# EAGLE board BX31 IoT Board MULTI (EAGLE 7.7.0), part 1 of 2
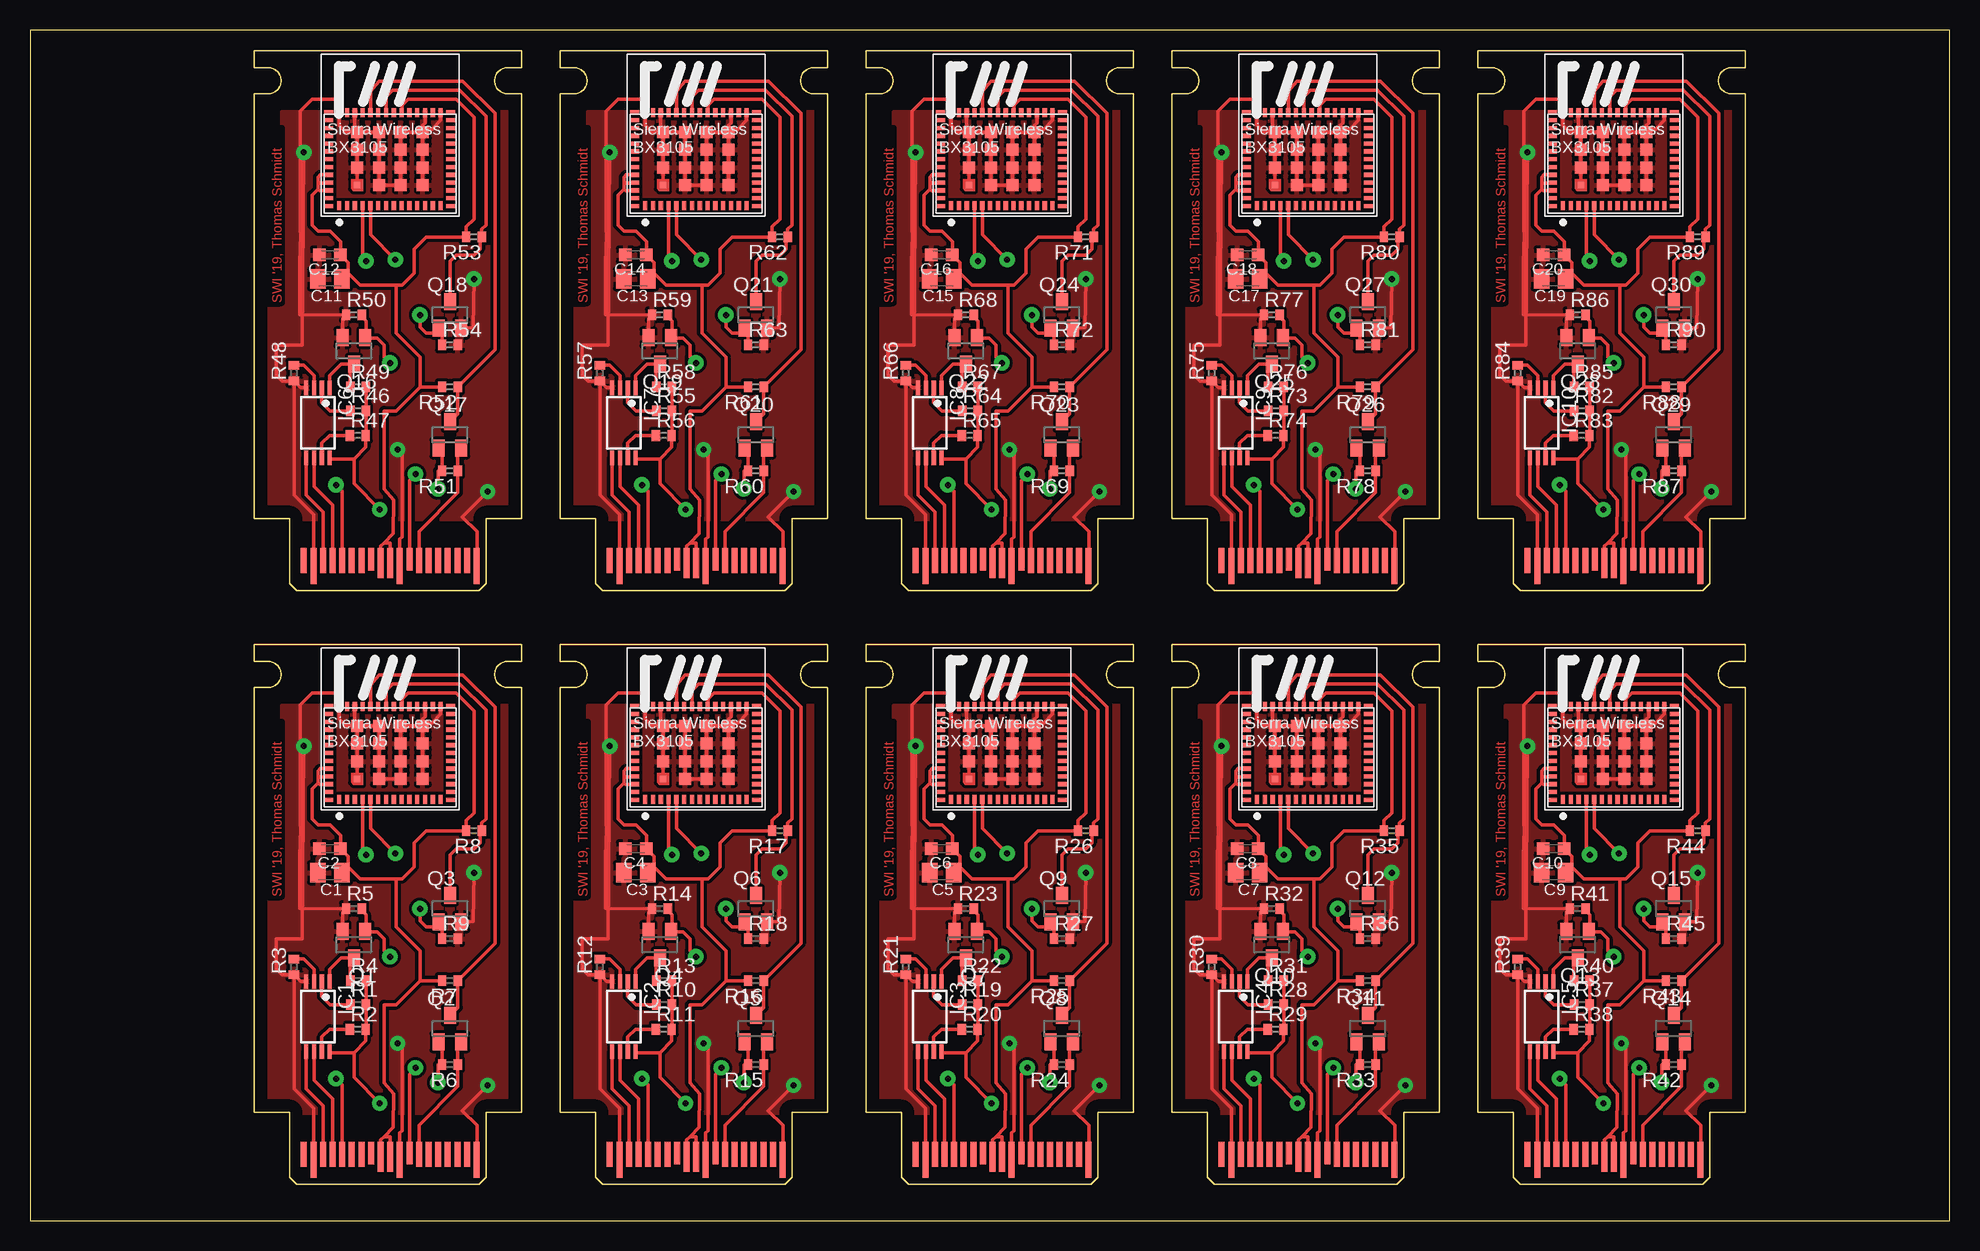
[diagram p0: board, top side]
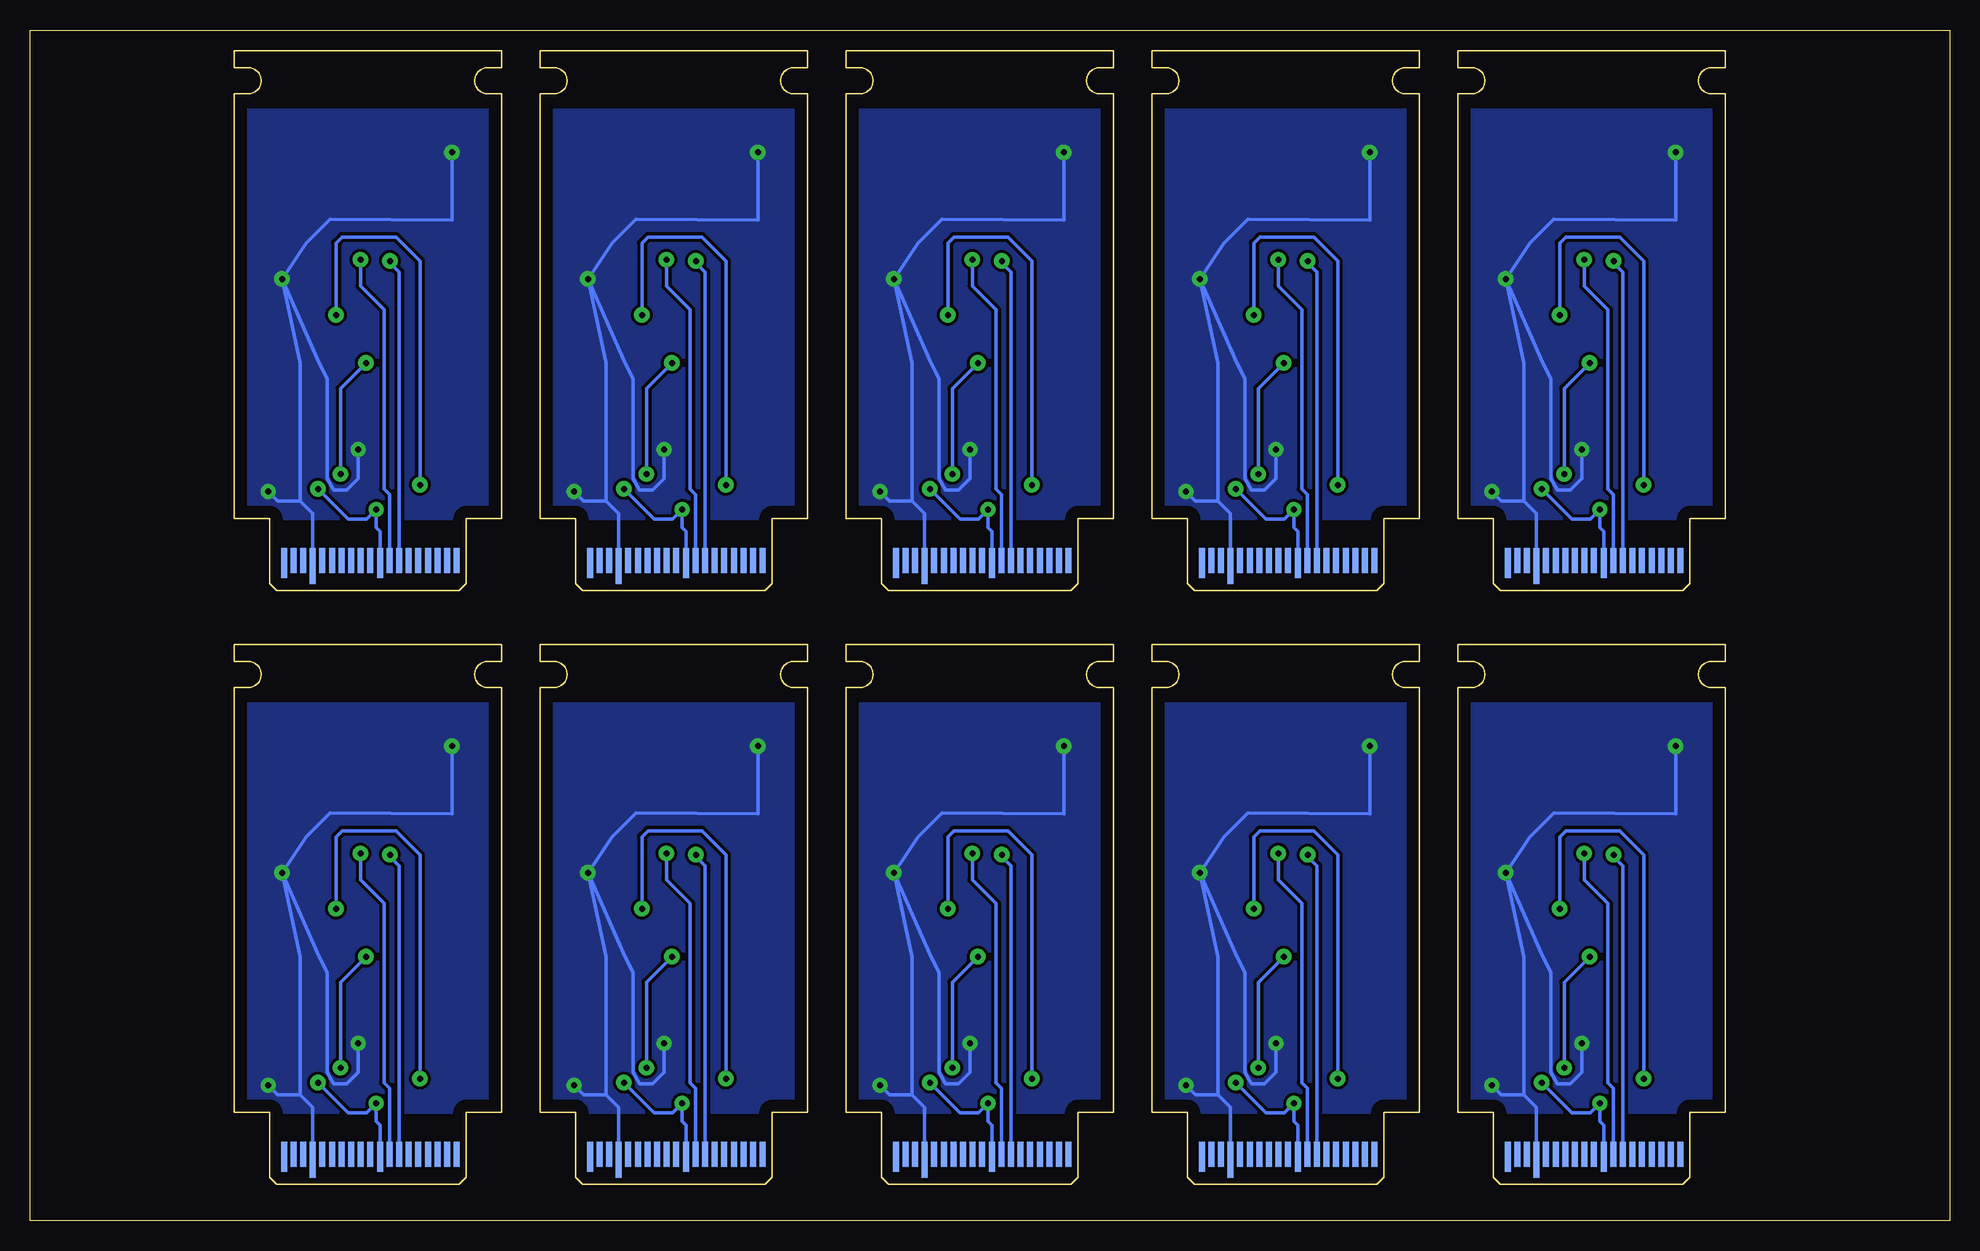
[diagram p1: board, bottom side, seen from below]

Size 160 x 99.25 mm. Coordinates in mm from the lower left corner, seen from the top.
Outline: 0,0 160,0 160,99.25 0,99.25 0,0
Copper layers (1*16): Top 0.035mm / dielectric 1.5mm / Bottom 0.035mm
Design rules "IoT Card DR": minimum track width 10mil, minimum drill 24mil, track to track 10mil, track to pad 10mil, pad to pad 10mil, via to via 10mil, smd to smd 8mil, copper to edge 40mil, drill to drill 8mil, minimum pad ring 10mil, minimum via ring 8mil, stop-mask expansion 4mil, vias tented up to drill 0mil, thermal gap 10mil

## Footprints (pad centres in the part's own frame; a part is rotated, then mirrored left to right if it is on the bottom)
C0805K = smd 1.3 x 1.6: 1 -1,0; 2 1,0
C0603K = smd 1.05 x 1.08: 1 -0.875,0; 2 0.875,0
TSSOP8 = smd 0.35 x 1.2: 1 -0.975,-2.925; 2 -0.325,-2.925; 3 0.325,-2.925; 4 0.975,-2.925; 5 0.975,2.925; 6 0.325,2.925; 7 -0.325,2.925; 8 -0.975,2.925
BX3105 = smd 0.75 x 0.35: 1 0.875,9.975; 2 0.875,9.325; 3 0.875,8.675; 4 0.875,8.025; 5 0.875,7.375; 6 0.875,6.725; 7 0.875,6.075; 8 0.875,5.425; 9 0.875,4.775; 10 0.875,4.125; 11 0.875,3.475; 12 0.875,2.825; 13 0.875,2.175; 14 0.875,1.525; 28 8.625,1.525; 29 8.625,2.175; 30 8.625,2.825; 31 8.625,3.475; 32 8.625,4.125; 33 8.625,4.775; 34 8.625,5.425; 35 8.625,6.075; 36 8.625,6.725; 37 8.625,7.375; 38 8.625,8.025; 39 8.625,8.675; 40 8.625,9.325; 41 8.625,9.975 | smd 0.35 x 0.75: 15 0.825,0.675; 16 1.475,0.675; 17 2.125,0.675; 18 2.775,0.675; 19 3.425,0.675; 20 4.075,0.675; 21 4.725,0.675; 22 5.375,0.675; 23 6.025,0.675; 24 6.675,0.675; 25 7.325,0.675; 26 7.975,0.675; 27 8.625,0.675; 42 8.625,10.85; 43 7.975,10.85; 44 7.325,10.85; 45 6.675,10.85; 46 6.025,10.85; 47 5.375,10.85; 48 4.725,10.85; 49 4.075,10.85; 50 3.425,10.85; 51 2.775,10.85; 52 2.125,10.85; 53 1.475,10.85; 54 0.825,10.85 | smd 0.5 x 0.5: G1 2.56,8.5 | smd 1 x 1: G2 4.038,8.487; G3 5.513,8.487; G4 6.988,8.487; G5 2.563,6.662; G6 4.038,6.662; G7 5.513,6.662; G8 6.988,6.662; G9 2.563,4.837; G10 4.038,4.837; G11 5.513,4.837; G12 6.988,4.837; G13 2.563,3.012; G14 4.038,3.012; G15 5.513,3.012; G16 6.988,3.012
SOT23 = smd 1 x 1.4: 1 -0.95,-1.1; 2 0.95,-1.1; 3 0,1.1
R0402 = smd 0.7 x 0.9: 1 -0.65,0; 2 0.65,0
IOT = smd 2.5 x 0.5 bottom: 1 2.3,4.15; 11 2.3,12.15 | smd 2.1 x 0.5 bottom: 2 2.5,4.95; 3 2.5,5.75; 5 2.5,7.35; 6 2.5,8.15; 7 2.5,8.95; 8 2.5,9.75; 9 2.5,10.55; 10 2.5,11.35; 12 2.5,12.95; 13 2.5,13.75; 14 2.5,14.55; 15 2.5,15.35; 16 2.5,16.15; 17 2.5,16.95; 18 2.5,17.75; 19 2.5,18.55 | smd 3 x 0.5 bottom: 4 2.05,6.55 | smd 2.1 x 0.5: 20 2.5,18.15; 22 2.5,16.55; 23 2.5,15.75; 24 2.5,14.95; 25 2.5,14.15; 26 2.5,13.35; 32 2.5,8.55; 33 2.5,7.75; 34 2.5,6.95; 35 2.5,6.15; 36 2.5,5.35; 37 2.5,4.55 | smd 3 x 0.5: 21 2.05,17.35; 30 2.05,10.15; 38 2.05,3.75 | smd 1.9 x 0.5: 27 2.6,12.55; 31 2.6,9.35 | smd 2.5 x 0.5: 28 2.3,11.75; 29 2.3,10.95

## Placement (x,y rotation side)
C1  22u  [C0805K]  25,29 180 top
C2  [C0603K]  25,31 180 top
C3  22u  [C0805K]  50.5,29 180 top
C4  [C0603K]  50.5,31 180 top
C5  22u  [C0805K]  76,29 180 top
C6  [C0603K]  76,31 180 top
C7  22u  [C0805K]  101.5,29 180 top
C8  [C0603K]  101.5,31 180 top
C9  22u  [C0805K]  127,29 180 top
C10  [C0603K]  127,31 180 top
C11  22u  [C0805K]  25,78.5 180 top
C12  [C0603K]  25,80.5 180 top
C13  22u  [C0805K]  50.5,78.5 180 top
C14  [C0603K]  50.5,80.5 180 top
C15  22u  [C0805K]  76,78.5 180 top
C16  [C0603K]  76,80.5 180 top
C17  22u  [C0805K]  101.5,78.5 180 top
C18  [C0603K]  101.5,80.5 180 top
C19  22u  [C0805K]  127,78.5 180 top
C20  [C0603K]  127,80.5 180 top
IC1  CAT24C32 YI-GT3  [TSSOP8]  24,17 180 top
IC2  CAT24C32 YI-GT3  [TSSOP8]  49.5,17 180 top
IC3  CAT24C32 YI-GT3  [TSSOP8]  75,17 180 top
IC4  CAT24C32 YI-GT3  [TSSOP8]  100.5,17 180 top
IC5  CAT24C32 YI-GT3  [TSSOP8]  126,17 180 top
IC6  CAT24C32 YI-GT3  [TSSOP8]  24,66.5 180 top
IC7  CAT24C32 YI-GT3  [TSSOP8]  49.5,66.5 180 top
IC8  CAT24C32 YI-GT3  [TSSOP8]  75,66.5 180 top
IC9  CAT24C32 YI-GT3  [TSSOP8]  100.5,66.5 180 top
IC10  CAT24C32 YI-GT3  [TSSOP8]  126,66.5 180 top
MODULE1  BX3105  [BX3105]  35.75,34.25 90 top
MODULE2  BX3105  [BX3105]  61.25,34.25 90 top
MODULE3  BX3105  [BX3105]  86.75,34.25 90 top
MODULE4  BX3105  [BX3105]  112.25,34.25 90 top
MODULE5  BX3105  [BX3105]  137.75,34.25 90 top
MODULE6  BX3105  [BX3105]  35.75,83.75 90 top
MODULE7  BX3105  [BX3105]  61.25,83.75 90 top
MODULE8  BX3105  [BX3105]  86.75,83.75 90 top
MODULE9  BX3105  [BX3105]  112.25,83.75 90 top
MODULE10  BX3105  [BX3105]  137.75,83.75 90 top
Q1  BSS138  [SOT23]  27,23 180 top
Q2  BSS138  [SOT23]  35,16 0 top
Q3  BSS138  [SOT23]  35,26 0 top
Q4  BSS138  [SOT23]  52.5,23 180 top
Q5  BSS138  [SOT23]  60.5,16 0 top
Q6  BSS138  [SOT23]  60.5,26 0 top
Q7  BSS138  [SOT23]  78,23 180 top
Q8  BSS138  [SOT23]  86,16 0 top
Q9  BSS138  [SOT23]  86,26 0 top
Q10  BSS138  [SOT23]  103.5,23 180 top
Q11  BSS138  [SOT23]  111.5,16 0 top
Q12  BSS138  [SOT23]  111.5,26 0 top
Q13  BSS138  [SOT23]  129,23 180 top
Q14  BSS138  [SOT23]  137,16 0 top
Q15  BSS138  [SOT23]  137,26 0 top
Q16  BSS138  [SOT23]  27,72.5 180 top
Q17  BSS138  [SOT23]  35,65.5 0 top
Q18  BSS138  [SOT23]  35,75.5 0 top
Q19  BSS138  [SOT23]  52.5,72.5 180 top
Q20  BSS138  [SOT23]  60.5,65.5 0 top
Q21  BSS138  [SOT23]  60.5,75.5 0 top
Q22  BSS138  [SOT23]  78,72.5 180 top
Q23  BSS138  [SOT23]  86,65.5 0 top
Q24  BSS138  [SOT23]  86,75.5 0 top
Q25  BSS138  [SOT23]  103.5,72.5 180 top
Q26  BSS138  [SOT23]  111.5,65.5 0 top
Q27  BSS138  [SOT23]  111.5,75.5 0 top
Q28  BSS138  [SOT23]  129,72.5 180 top
Q29  BSS138  [SOT23]  137,65.5 0 top
Q30  BSS138  [SOT23]  137,75.5 0 top
R1  10k  [R0402]  27.35,18 0 top
R2  10k  [R0402]  27.32,15.95 0 top
R3  10k  [R0402]  22,21.15 90 top
R4  10k  [R0402]  27.35,20 0 top
R5  10k  [R0402]  27,26 0 top
R6  10k  [R0402]  35,13 180 top
R7  10k  [R0402]  35,20 180 top
R8  10k  [R0402]  37,32.5 180 top
R9  10k  [R0402]  35,23.5 0 top
R10  10k  [R0402]  52.85,18 0 top
R11  10k  [R0402]  52.83,15.95 0 top
R12  10k  [R0402]  47.5,21.15 90 top
R13  10k  [R0402]  52.85,20 0 top
R14  10k  [R0402]  52.5,26 0 top
R15  10k  [R0402]  60.5,13 180 top
R16  10k  [R0402]  60.5,20 180 top
R17  10k  [R0402]  62.5,32.5 180 top
R18  10k  [R0402]  60.5,23.5 0 top
R19  10k  [R0402]  78.35,18 0 top
R20  10k  [R0402]  78.33,15.95 0 top
R21  10k  [R0402]  73,21.15 90 top
R22  10k  [R0402]  78.35,20 0 top
R23  10k  [R0402]  78,26 0 top
R24  10k  [R0402]  86,13 180 top
R25  10k  [R0402]  86,20 180 top
R26  10k  [R0402]  88,32.5 180 top
R27  10k  [R0402]  86,23.5 0 top
R28  10k  [R0402]  103.85,18 0 top
R29  10k  [R0402]  103.83,15.95 0 top
R30  10k  [R0402]  98.5,21.15 90 top
R31  10k  [R0402]  103.85,20 0 top
R32  10k  [R0402]  103.5,26 0 top
R33  10k  [R0402]  111.5,13 180 top
R34  10k  [R0402]  111.5,20 180 top
R35  10k  [R0402]  113.5,32.5 180 top
R36  10k  [R0402]  111.5,23.5 0 top
R37  10k  [R0402]  129.35,18 0 top
R38  10k  [R0402]  129.32,15.95 0 top
R39  10k  [R0402]  124,21.15 90 top
R40  10k  [R0402]  129.35,20 0 top
R41  10k  [R0402]  129,26 0 top
R42  10k  [R0402]  137,13 180 top
R43  10k  [R0402]  137,20 180 top
R44  10k  [R0402]  139,32.5 180 top
R45  10k  [R0402]  137,23.5 0 top
R46  10k  [R0402]  27.35,67.5 0 top
R47  10k  [R0402]  27.32,65.45 0 top
R48  10k  [R0402]  22,70.65 90 top
R49  10k  [R0402]  27.35,69.5 0 top
R50  10k  [R0402]  27,75.5 0 top
R51  10k  [R0402]  35,62.5 180 top
R52  10k  [R0402]  35,69.5 180 top
R53  10k  [R0402]  37,82 180 top
R54  10k  [R0402]  35,73 0 top
R55  10k  [R0402]  52.85,67.5 0 top
R56  10k  [R0402]  52.83,65.45 0 top
R57  10k  [R0402]  47.5,70.65 90 top
R58  10k  [R0402]  52.85,69.5 0 top
R59  10k  [R0402]  52.5,75.5 0 top
R60  10k  [R0402]  60.5,62.5 180 top
R61  10k  [R0402]  60.5,69.5 180 top
R62  10k  [R0402]  62.5,82 180 top
R63  10k  [R0402]  60.5,73 0 top
R64  10k  [R0402]  78.35,67.5 0 top
R65  10k  [R0402]  78.33,65.45 0 top
R66  10k  [R0402]  73,70.65 90 top
R67  10k  [R0402]  78.35,69.5 0 top
R68  10k  [R0402]  78,75.5 0 top
R69  10k  [R0402]  86,62.5 180 top
R70  10k  [R0402]  86,69.5 180 top
R71  10k  [R0402]  88,82 180 top
R72  10k  [R0402]  86,73 0 top
R73  10k  [R0402]  103.85,67.5 0 top
R74  10k  [R0402]  103.83,65.45 0 top
R75  10k  [R0402]  98.5,70.65 90 top
R76  10k  [R0402]  103.85,69.5 0 top
R77  10k  [R0402]  103.5,75.5 0 top
R78  10k  [R0402]  111.5,62.5 180 top
R79  10k  [R0402]  111.5,69.5 180 top
R80  10k  [R0402]  113.5,82 180 top
R81  10k  [R0402]  111.5,73 0 top
R82  10k  [R0402]  129.35,67.5 0 top
R83  10k  [R0402]  129.32,65.45 0 top
R84  10k  [R0402]  124,70.65 90 top
R85  10k  [R0402]  129.35,69.5 0 top
R86  10k  [R0402]  129,75.5 0 top
R87  10k  [R0402]  137,62.5 180 top
R88  10k  [R0402]  137,69.5 180 top
R89  10k  [R0402]  139,82 180 top
R90  10k  [R0402]  137,73 0 top
U$1  IOT  [IOT]  40.98,3.02 90 top
U$2  IOT  [IOT]  66.48,3.02 90 top
U$3  IOT  [IOT]  91.98,3.02 90 top
U$4  IOT  [IOT]  117.48,3.02 90 top
U$5  IOT  [IOT]  142.98,3.02 90 top
U$6  IOT  [IOT]  40.98,52.52 90 top
U$7  IOT  [IOT]  66.48,52.52 90 top
U$8  IOT  [IOT]  91.98,52.52 90 top
U$9  IOT  [IOT]  117.48,52.52 90 top
U$10  IOT  [IOT]  142.98,52.52 90 top

## Library data of the parts
C1-C20 R1-R90 = rcl
IC1-IC10 = microchip; MPN: CAT24C64YI-GT3; OC_FARNELL: 1718133; OC_NEWARK: 08R5418
MODULE1-MODULE10 = Sierra BX310x
Q1-Q30 = transistor-small-signal
U$1-U$10 = IoT Card

## Nets
BX-RX_IOT-TX: MODULE1.5 U$1.12
BX-RX_IOT-TX1: MODULE2.5 U$2.12
BX-RX_IOT-TX2: MODULE3.5 U$3.12
BX-RX_IOT-TX3: MODULE4.5 U$4.12
BX-RX_IOT-TX4: MODULE5.5 U$5.12
BX-RX_IOT-TX5: MODULE6.5 U$6.12
BX-RX_IOT-TX6: MODULE7.5 U$7.12
BX-RX_IOT-TX7: MODULE8.5 U$8.12
BX-RX_IOT-TX8: MODULE9.5 U$9.12
BX-RX_IOT-TX9: MODULE10.5 U$10.12
BX-TX_IOT-RX: MODULE1.4 U$1.13
BX-TX_IOT-RX1: MODULE2.4 U$2.13
BX-TX_IOT-RX2: MODULE3.4 U$3.13
BX-TX_IOT-RX3: MODULE4.4 U$4.13
BX-TX_IOT-RX4: MODULE5.4 U$5.13
BX-TX_IOT-RX5: MODULE6.4 U$6.13
BX-TX_IOT-RX6: MODULE7.4 U$7.13
BX-TX_IOT-RX7: MODULE8.4 U$8.13
BX-TX_IOT-RX8: MODULE9.4 U$9.13
BX-TX_IOT-RX9: MODULE10.4 U$10.13
EEPROM_A0: IC1.1 Q1.3 R4.1
EEPROM_A1: IC1.2 R1.1
EEPROM_A2: IC1.3 R3.2
EEPROM_A3: IC2.3 R12.2
EEPROM_A4: IC2.2 R10.1
EEPROM_A5: IC2.1 Q4.3 R13.1
EEPROM_A6: IC3.3 R21.2
EEPROM_A7: IC3.2 R19.1
EEPROM_A8: IC3.1 Q7.3 R22.1
EEPROM_A9: IC4.3 R30.2
EEPROM_A10: IC4.2 R28.1
EEPROM_A11: IC4.1 Q10.3 R31.1
EEPROM_A12: IC5.3 R39.2
EEPROM_A13: IC5.2 R37.1
EEPROM_A14: IC5.1 Q13.3 R40.1
EEPROM_A15: IC6.3 R48.2
EEPROM_A16: IC6.2 R46.1
EEPROM_A17: IC6.1 Q16.3 R49.1
EEPROM_A18: IC7.3 R57.2
EEPROM_A19: IC7.2 R55.1
EEPROM_A20: IC7.1 Q19.3 R58.1
EEPROM_A21: IC8.3 R66.2
EEPROM_A22: IC8.2 R64.1
EEPROM_A23: IC8.1 Q22.3 R67.1
EEPROM_A24: IC9.3 R75.2
EEPROM_A25: IC9.2 R73.1
EEPROM_A26: IC9.1 Q25.3 R76.1
EEPROM_A27: IC10.3 R84.2
EEPROM_A28: IC10.2 R82.1
EEPROM_A29: IC10.1 Q28.3 R85.1
EEPROM_WP: IC1.7 R2.1
EEPROM_WP1: IC2.7 R11.1
EEPROM_WP2: IC3.7 R20.1
EEPROM_WP3: IC4.7 R29.1
EEPROM_WP4: IC5.7 R38.1
EEPROM_WP5: IC6.7 R47.1
EEPROM_WP6: IC7.7 R56.1
EEPROM_WP7: IC8.7 R65.1
EEPROM_WP8: IC9.7 R74.1
EEPROM_WP9: IC10.7 R83.1
ENABLE: MODULE1.37 Q2.3 R7.1
ENABLE1: MODULE2.37 Q5.3 R16.1
ENABLE2: MODULE3.37 Q8.3 R25.1
ENABLE3: MODULE4.37 Q11.3 R34.1
ENABLE4: MODULE5.37 Q14.3 R43.1
ENABLE5: MODULE6.37 Q17.3 R52.1
ENABLE6: MODULE7.37 Q20.3 R61.1
ENABLE7: MODULE8.37 Q23.3 R70.1
ENABLE8: MODULE9.37 Q26.3 R79.1
ENABLE9: MODULE10.37 Q29.3 R88.1
FW_UPDATE: MODULE1.35 Q3.3 R8.1
FW_UPDATE1: MODULE2.35 Q6.3 R17.1
FW_UPDATE2: MODULE3.35 Q9.3 R26.1
FW_UPDATE3: MODULE4.35 Q12.3 R35.1
FW_UPDATE4: MODULE5.35 Q15.3 R44.1
FW_UPDATE5: MODULE6.35 Q18.3 R53.1
FW_UPDATE6: MODULE7.35 Q21.3 R62.1
FW_UPDATE7: MODULE8.35 Q24.3 R71.1
FW_UPDATE8: MODULE9.35 Q27.3 R80.1
FW_UPDATE9: MODULE10.35 Q30.3 R89.1
GND: C1.2 C2.2 IC1.4 MODULE1.28 MODULE1.30 MODULE1.39 MODULE1.41 MODULE1.G1 MODULE1.G2 MODULE1.G3 MODULE1.G4 MODULE1.G5 MODULE1.G6 MODULE1.G7 MODULE1.G8 MODULE1.G9 MODULE1.G10 MODULE1.G11 MODULE1.G12 MODULE1.G13 MODULE1.G14 MODULE1.G15 MODULE1.G16 Q1.2 Q3.2 R3.1 R5.1 R9.2 U$1.4 U$1.21 U$1.30 U$1.38
GND1: C3.2 C4.2 IC2.4 MODULE2.28 MODULE2.30 MODULE2.39 MODULE2.41 MODULE2.G1 MODULE2.G2 MODULE2.G3 MODULE2.G4 MODULE2.G5 MODULE2.G6 MODULE2.G7 MODULE2.G8 MODULE2.G9 MODULE2.G10 MODULE2.G11 MODULE2.G12 MODULE2.G13 MODULE2.G14 MODULE2.G15 MODULE2.G16 Q4.2 Q6.2 R12.1 R14.1 R18.2 U$2.4 U$2.21 U$2.30 U$2.38
GND2: C5.2 C6.2 IC3.4 MODULE3.28 MODULE3.30 MODULE3.39 MODULE3.41 MODULE3.G1 MODULE3.G2 MODULE3.G3 MODULE3.G4 MODULE3.G5 MODULE3.G6 MODULE3.G7 MODULE3.G8 MODULE3.G9 MODULE3.G10 MODULE3.G11 MODULE3.G12 MODULE3.G13 MODULE3.G14 MODULE3.G15 MODULE3.G16 Q7.2 Q9.2 R21.1 R23.1 R27.2 U$3.4 U$3.21 U$3.30 U$3.38
GND3: C7.2 C8.2 IC4.4 MODULE4.28 MODULE4.30 MODULE4.39 MODULE4.41 MODULE4.G1 MODULE4.G2 MODULE4.G3 MODULE4.G4 MODULE4.G5 MODULE4.G6 MODULE4.G7 MODULE4.G8 MODULE4.G9 MODULE4.G10 MODULE4.G11 MODULE4.G12 MODULE4.G13 MODULE4.G14 MODULE4.G15 MODULE4.G16 Q10.2 Q12.2 R30.1 R32.1 R36.2 U$4.4 U$4.21 U$4.30 U$4.38
GND4: C9.2 C10.2 IC5.4 MODULE5.28 MODULE5.30 MODULE5.39 MODULE5.41 MODULE5.G1 MODULE5.G2 MODULE5.G3 MODULE5.G4 MODULE5.G5 MODULE5.G6 MODULE5.G7 MODULE5.G8 MODULE5.G9 MODULE5.G10 MODULE5.G11 MODULE5.G12 MODULE5.G13 MODULE5.G14 MODULE5.G15 MODULE5.G16 Q13.2 Q15.2 R39.1 R41.1 R45.2 U$5.4 U$5.21 U$5.30 U$5.38
GND5: C11.2 C12.2 IC6.4 MODULE6.28 MODULE6.30 MODULE6.39 MODULE6.41 MODULE6.G1 MODULE6.G2 MODULE6.G3 MODULE6.G4 MODULE6.G5 MODULE6.G6 MODULE6.G7 MODULE6.G8 MODULE6.G9 MODULE6.G10 MODULE6.G11 MODULE6.G12 MODULE6.G13 MODULE6.G14 MODULE6.G15 MODULE6.G16 Q16.2 Q18.2 R48.1 R50.1 R54.2 U$6.4 U$6.21 U$6.30 U$6.38
GND6: C13.2 C14.2 IC7.4 MODULE7.28 MODULE7.30 MODULE7.39 MODULE7.41 MODULE7.G1 MODULE7.G2 MODULE7.G3 MODULE7.G4 MODULE7.G5 MODULE7.G6 MODULE7.G7 MODULE7.G8 MODULE7.G9 MODULE7.G10 MODULE7.G11 MODULE7.G12 MODULE7.G13 MODULE7.G14 MODULE7.G15 MODULE7.G16 Q19.2 Q21.2 R57.1 R59.1 R63.2 U$7.4 U$7.21 U$7.30 U$7.38
GND7: C15.2 C16.2 IC8.4 MODULE8.28 MODULE8.30 MODULE8.39 MODULE8.41 MODULE8.G1 MODULE8.G2 MODULE8.G3 MODULE8.G4 MODULE8.G5 MODULE8.G6 MODULE8.G7 MODULE8.G8 MODULE8.G9 MODULE8.G10 MODULE8.G11 MODULE8.G12 MODULE8.G13 MODULE8.G14 MODULE8.G15 MODULE8.G16 Q22.2 Q24.2 R66.1 R68.1 R72.2 U$8.4 U$8.21 U$8.30 U$8.38
GND8: C17.2 C18.2 IC9.4 MODULE9.28 MODULE9.30 MODULE9.39 MODULE9.41 MODULE9.G1 MODULE9.G2 MODULE9.G3 MODULE9.G4 MODULE9.G5 MODULE9.G6 MODULE9.G7 MODULE9.G8 MODULE9.G9 MODULE9.G10 MODULE9.G11 MODULE9.G12 MODULE9.G13 MODULE9.G14 MODULE9.G15 MODULE9.G16 Q25.2 Q27.2 R75.1 R77.1 R81.2 U$9.4 U$9.21 U$9.30 U$9.38
GND9: C19.2 C20.2 IC10.4 MODULE10.28 MODULE10.30 MODULE10.39 MODULE10.41 MODULE10.G1 MODULE10.G2 MODULE10.G3 MODULE10.G4 MODULE10.G5 MODULE10.G6 MODULE10.G7 MODULE10.G8 MODULE10.G9 MODULE10.G10 MODULE10.G11 MODULE10.G12 MODULE10.G13 MODULE10.G14 MODULE10.G15 MODULE10.G16 Q28.2 Q30.2 R84.1 R86.1 R90.2 U$10.4 U$10.21 U$10.30 U$10.38
GPIO_1_1V1: Q6.1 R18.1 U$2.24
GPIO_1_1V2: Q9.1 R27.1 U$3.24
GPIO_1_1V3: Q12.1 R36.1 U$4.24
GPIO_1_1V4: Q15.1 R45.1 U$5.24
GPIO_1_1V5: Q18.1 R54.1 U$6.24
GPIO_1_1V6: Q21.1 R63.1 U$7.24
GPIO_1_1V7: Q24.1 R72.1 U$8.24
GPIO_1_1V8: Q3.1 R9.1 U$1.24
GPIO_1_1V9: Q27.1 R81.1 U$9.24
GPIO_1_1V10: Q30.1 R90.1 U$10.24
I2C_SCL: IC1.6 U$1.23
I2C_SCL1: IC2.6 U$2.23
I2C_SCL2: IC3.6 U$3.23
I2C_SCL3: IC4.6 U$4.23
I2C_SCL4: IC5.6 U$5.23
I2C_SCL5: IC6.6 U$6.23
I2C_SCL6: IC7.6 U$7.23
I2C_SCL7: IC8.6 U$8.23
I2C_SCL8: IC9.6 U$9.23
I2C_SCL9: IC10.6 U$10.23
I2C_SDA: IC1.5 U$1.22
I2C_SDA1: IC2.5 U$2.22
I2C_SDA2: IC3.5 U$3.22
I2C_SDA3: IC4.5 U$4.22
I2C_SDA4: IC5.5 U$5.22
I2C_SDA5: IC6.5 U$6.22
I2C_SDA6: IC7.5 U$7.22
I2C_SDA7: IC8.5 U$8.22
I2C_SDA8: IC9.5 U$9.22
I2C_SDA9: IC10.5 U$10.22
N_CARD_DETECT: Q1.1 R5.2 U$1.31
N_CARD_DETECT1: Q4.1 R14.2 U$2.31
N_CARD_DETECT2: Q7.1 R23.2 U$3.31
N_CARD_DETECT3: Q10.1 R32.2 U$4.31
N_CARD_DETECT4: Q13.1 R41.2 U$5.31
N_CARD_DETECT5: Q16.1 R50.2 U$6.31
N_CARD_DETECT6: Q19.1 R59.2 U$7.31
N_CARD_DETECT7: Q22.1 R68.2 U$8.31
N_CARD_DETECT8: Q25.1 R77.2 U$9.31
N_CARD_DETECT9: Q28.1 R86.2 U$10.31
N_RESET: Q2.2 R6.1 U$1.32
N_RESET1: Q5.2 R15.1 U$2.32
N_RESET2: Q8.2 R24.1 U$3.32
N_RESET3: Q11.2 R33.1 U$4.32
N_RESET4: Q14.2 R42.1 U$5.32
N_RESET5: Q17.2 R51.1 U$6.32
N_RESET6: Q20.2 R60.1 U$7.32
N_RESET7: Q23.2 R69.1 U$8.32
N_RESET8: Q26.2 R78.1 U$9.32
N_RESET9: Q29.2 R87.1 U$10.32
VCC_1V1: IC2.8 Q5.1 R10.2 R11.2 R13.2 R15.2 U$2.11
VCC_1V2: IC3.8 Q8.1 R19.2 R20.2 R22.2 R24.2 U$3.11
VCC_1V3: IC4.8 Q11.1 R28.2 R29.2 R31.2 R33.2 U$4.11
VCC_1V4: IC5.8 Q14.1 R37.2 R38.2 R40.2 R42.2 U$5.11
VCC_1V5: IC6.8 Q17.1 R46.2 R47.2 R49.2 R51.2 U$6.11
VCC_1V6: IC7.8 Q20.1 R55.2 R56.2 R58.2 R60.2 U$7.11
VCC_1V7: IC8.8 Q23.1 R64.2 R65.2 R67.2 R69.2 U$8.11
VCC_1V8: IC1.8 Q2.1 R1.2 R2.2 R4.2 R6.2 U$1.11
VCC_1V9: IC9.8 Q26.1 R73.2 R74.2 R76.2 R78.2 U$9.11
VCC_1V10: IC10.8 Q29.1 R82.2 R83.2 R85.2 R87.2 U$10.11
VCC_3V1: C3.1 C4.1 MODULE2.33 MODULE2.50 MODULE2.51 MODULE2.52 R16.2 R17.2 U$2.28 U$2.29
VCC_3V2: C5.1 C6.1 MODULE3.33 MODULE3.50 MODULE3.51 MODULE3.52 R25.2 R26.2 U$3.28 U$3.29
VCC_3V3: C1.1 C2.1 MODULE1.33 MODULE1.50 MODULE1.51 MODULE1.52 R7.2 R8.2 U$1.28 U$1.29
VCC_3V4: C7.1 C8.1 MODULE4.33 MODULE4.50 MODULE4.51 MODULE4.52 R34.2 R35.2 U$4.28 U$4.29
VCC_3V5: C9.1 C10.1 MODULE5.33 MODULE5.50 MODULE5.51 MODULE5.52 R43.2 R44.2 U$5.28 U$5.29
VCC_3V6: C11.1 C12.1 MODULE6.33 MODULE6.50 MODULE6.51 MODULE6.52 R52.2 R53.2 U$6.28 U$6.29
VCC_3V7: C13.1 C14.1 MODULE7.33 MODULE7.50 MODULE7.51 MODULE7.52 R61.2 R62.2 U$7.28 U$7.29
VCC_3V8: C15.1 C16.1 MODULE8.33 MODULE8.50 MODULE8.51 MODULE8.52 R70.2 R71.2 U$8.28 U$8.29
VCC_3V9: C17.1 C18.1 MODULE9.33 MODULE9.50 MODULE9.51 MODULE9.52 R79.2 R80.2 U$9.28 U$9.29
VCC_3V10: C19.1 C20.1 MODULE10.33 MODULE10.50 MODULE10.51 MODULE10.52 R88.2 R89.2 U$10.28 U$10.29
VCC_5V1: U$2.1
VCC_5V2: U$3.1
VCC_5V3: U$4.1
VCC_5V4: U$5.1
VCC_5V5: U$1.1
VCC_5V6: U$6.1
VCC_5V7: U$7.1
VCC_5V8: U$8.1
VCC_5V9: U$9.1
VCC_5V10: U$10.1